# EAGLE board badge_spacehuhn (EAGLE 7.6.0)
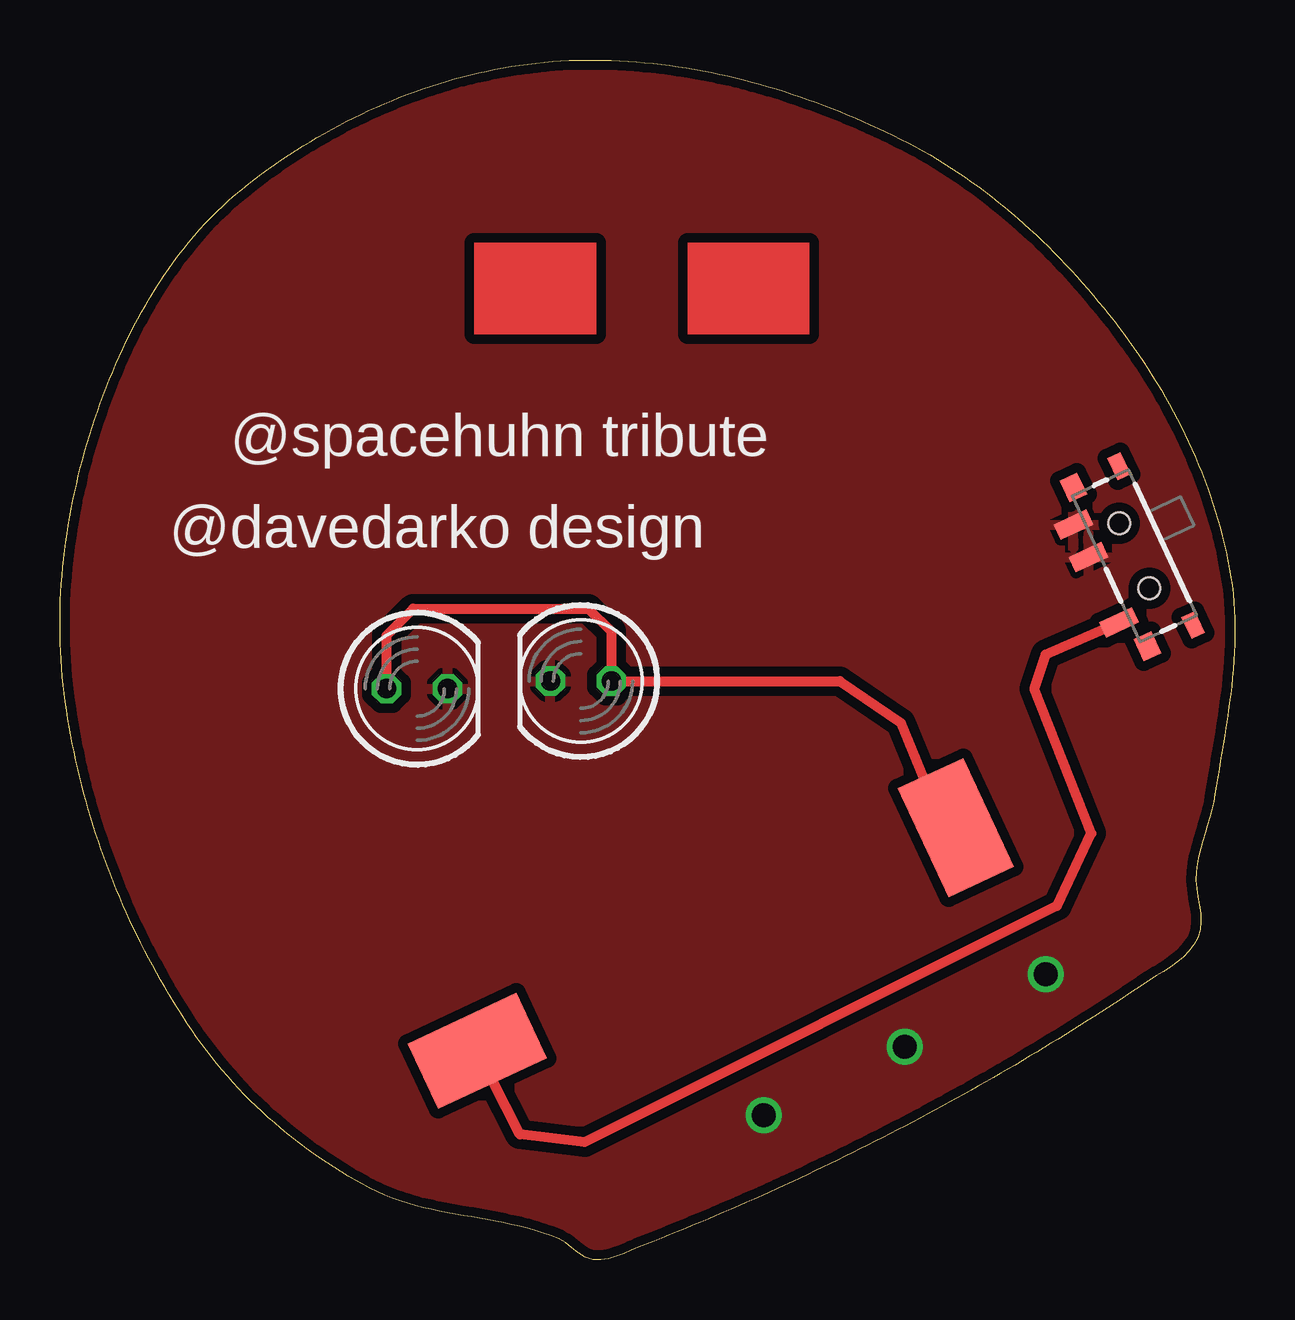
[diagram p0: board, top side]
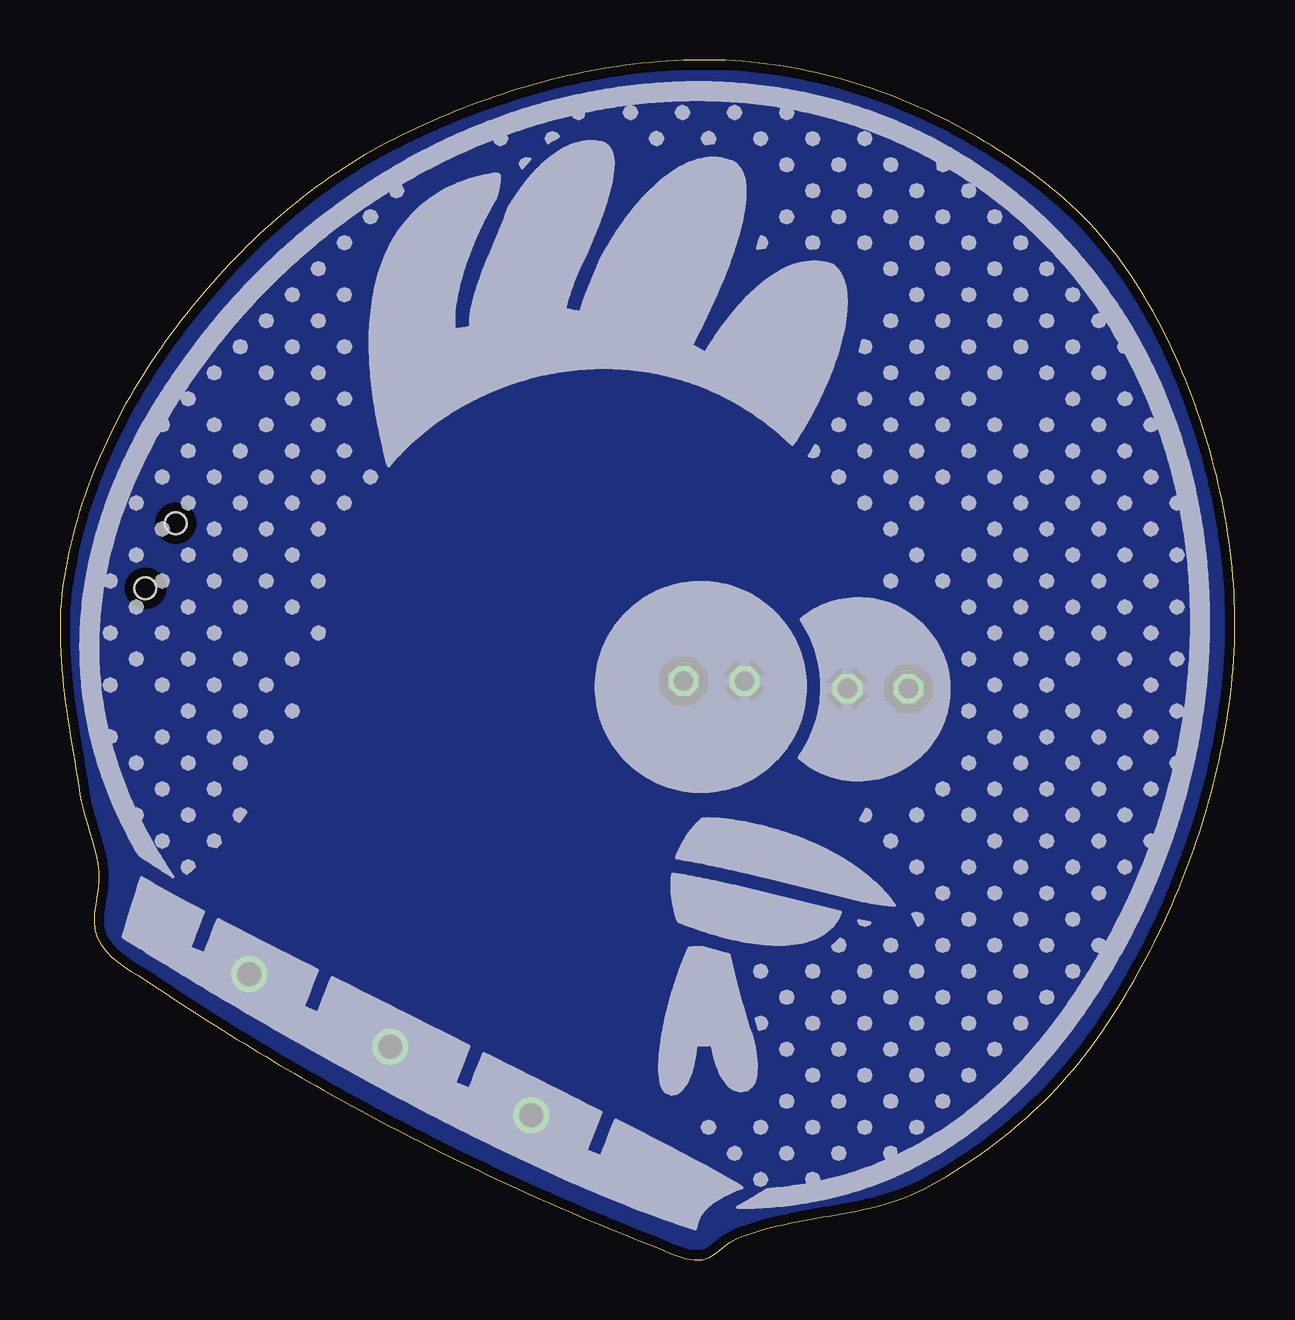
[diagram p1: board, bottom side, seen from below]

Size 48.96 x 50 mm. Coordinates in mm from the lower left corner, seen from the top.
Outline: 20.17,49.9 20.52,49.93 20.87,49.96 21.22,49.98 21.57,49.99 21.92,49.99 22.27,50 22.62,49.99 22.97,49.98 23.32,49.97 23.67,49.95 24.02,49.92 24.37,49.89 24.71,49.86 25.06,49.82 25.41,49.77 25.76,49.72 26.1,49.67 26.45,49.61 26.79,49.54 27.13,49.48 27.48,49.41 27.82,49.33 28.16,49.25 28.5,49.16 28.84,49.08 29.17,48.98 29.51,48.89 29.85,48.79 30.18,48.68 30.51,48.58 30.84,48.46 31.17,48.35 31.5,48.23 31.83,48.11 32.16,47.98 32.48,47.85 32.81,47.72 33.13,47.58 33.45,47.44 33.77,47.3 34.09,47.15 34.4,47.01 34.72,46.85 35.03,46.7 35.34,46.54 35.65,46.38 35.95,46.21 36.25,46.04 36.55,45.86 36.85,45.68 37.14,45.49 37.43,45.3 37.71,45.11 38,44.91 38.28,44.71 38.55,44.5 38.83,44.29 39.1,44.07 39.37,43.86 39.63,43.63 39.9,43.41 40.16,43.18 40.41,42.95 40.67,42.71 40.92,42.47 41.17,42.23 41.41,41.99 41.66,41.74 41.9,41.49 42.13,41.24 42.37,40.98 42.59,40.72 42.82,40.46 43.05,40.2 43.27,39.93 43.49,39.66 43.7,39.39 43.92,39.12 44.13,38.85 44.34,38.57 44.54,38.29 44.74,38.01 44.94,37.72 45.14,37.43 45.33,37.14 45.52,36.85 45.7,36.55 45.88,36.25 46.06,35.95 46.23,35.65 46.39,35.34 46.56,35.03 46.72,34.72 46.87,34.41 47.02,34.09 47.16,33.78 47.3,33.46 47.44,33.13 47.57,32.81 47.69,32.49 47.81,32.16 47.93,31.83 48.04,31.5 48.15,31.17 48.25,30.83 48.34,30.5 48.43,30.16 48.51,29.82 48.59,29.48 48.66,29.14 48.73,28.8 48.79,28.45 48.84,28.11 48.88,27.76 48.91,27.41 48.94,27.06 48.95,26.71 48.96,26.36 48.95,26.01 48.95,25.66 48.93,25.31 48.91,24.96 48.88,24.61 48.85,24.26 48.81,23.91 48.77,23.56 48.73,23.22 48.68,22.87 48.63,22.52 48.58,22.18 48.52,21.83 48.47,21.48 48.41,21.14 48.35,20.79 48.29,20.45 48.24,20.1 48.18,19.75 48.12,19.41 48.06,19.08 47.99,18.76 47.9,18.43 47.81,18.11 47.71,17.79 47.62,17.47 47.53,17.15 47.45,16.83 47.39,16.5 47.34,16.17 47.33,15.82 47.36,15.48 47.42,15.14 47.47,14.79 47.52,14.45 47.54,14.1 47.51,13.76 47.41,13.43 47.24,13.13 47.03,12.86 46.79,12.62 46.53,12.4 46.25,12.2 45.97,12.01 45.68,11.83 45.39,11.65 45.11,11.47 44.82,11.27 44.52,11.08 44.23,10.89 43.94,10.7 43.65,10.5 43.36,10.32 43.06,10.13 42.77,9.94 42.47,9.75 42.18,9.57 41.88,9.38 41.59,9.2 41.29,9.02 40.99,8.83 40.69,8.65 40.39,8.47 40.09,8.3 39.79,8.12 39.49,7.94 39.19,7.77 38.89,7.59 38.58,7.42 38.28,7.25 37.98,7.07 37.67,6.9 37.37,6.73 37.06,6.57 36.76,6.4 36.45,6.23 36.14,6.07 35.83,5.9 35.52,5.74 35.22,5.58 34.91,5.41 34.6,5.25 34.29,5.09 33.98,4.94 33.66,4.78 33.35,4.62 33.04,4.47 32.73,4.31 32.41,4.16 32.1,4.01 31.79,3.85 31.47,3.7 31.16,3.55 30.84,3.41 30.52,3.26 30.21,3.11 29.89,2.97 29.57,2.82 29.25,2.68 28.93,2.54 28.61,2.4 28.29,2.25 27.97,2.12 27.65,1.98 27.33,1.84 27.01,1.7 26.69,1.57 26.37,1.43 26.05,1.3 25.72,1.17 25.4,1.04 25.08,0.91 24.75,0.78 24.43,0.65 24.1,0.52 23.79,0.4 23.49,0.27 23.18,0.15 22.86,0.05 22.53,0 22.2,0.01 21.88,0.11 21.59,0.29 21.33,0.5 21.07,0.71 20.78,0.87 20.46,1 20.14,1.11 19.81,1.22 19.49,1.31 19.16,1.4 18.82,1.47 18.49,1.54 18.16,1.61 17.82,1.67 17.49,1.73 17.15,1.79 16.82,1.85 16.48,1.91 16.14,1.97 15.81,2.03 15.48,2.1 15.14,2.18 14.81,2.26 14.49,2.35 14.16,2.45 13.84,2.57 13.52,2.69 13.21,2.83 12.91,2.99 12.6,3.15 12.3,3.32 12.01,3.49 11.71,3.67 11.42,3.85 11.13,4.04 10.85,4.23 10.56,4.43 10.29,4.63 10.01,4.84 9.74,5.05 9.47,5.26 9.2,5.48 8.94,5.7 8.68,5.93 8.42,6.16 8.17,6.4 7.93,6.64 7.68,6.88 7.44,7.13 7.21,7.38 6.98,7.64 6.76,7.9 6.54,8.17 6.32,8.44 6.11,8.71 5.91,8.99 5.71,9.27 5.51,9.56 5.31,9.85 5.12,10.14 4.93,10.44 4.74,10.74 4.56,11.04 4.38,11.34 4.2,11.65 4.03,11.96 3.86,12.27 3.69,12.58 3.53,12.89 3.37,13.2 3.21,13.52 3.06,13.84 2.91,14.16 2.76,14.48 2.62,14.8 2.48,15.12 2.35,15.45 2.21,15.78 2.09,16.1 1.96,16.43 1.84,16.76 1.72,17.1 1.61,17.43 1.49,17.76 1.39,18.1 1.28,18.44 1.18,18.77 1.09,19.11 0.99,19.45 0.91,19.79 0.82,20.14 0.74,20.48 0.66,20.82 0.59,21.17 0.52,21.51 0.45,21.86 0.39,22.21 0.33,22.55 0.28,22.9 0.23,23.25 0.18,23.6 0.14,23.95 0.1,24.3 0.07,24.65 0.05,25 0.03,25.35 0.01,25.7 0,26.05 0,26.41 0,26.76 0.01,27.11 0.02,27.46 0.04,27.81 0.06,28.16 0.09,28.51 0.12,28.86 0.15,29.21 0.2,29.56 0.24,29.91 0.29,30.25 0.35,30.6 0.41,30.95 0.47,31.29 0.54,31.64 0.61,31.98 0.69,32.32 0.77,32.67 0.85,33.01 0.94,33.35 1.04,33.68 1.14,34.02 1.24,34.36 1.34,34.69 1.45,35.03 1.57,35.36 1.68,35.69 1.81,36.02 1.93,36.35 2.06,36.67 2.19,36.99 2.33,37.32 2.47,37.64 2.62,37.95 2.77,38.27 2.92,38.58 3.08,38.89 3.24,39.2 3.41,39.51 3.58,39.81 3.76,40.12 3.94,40.41 4.13,40.71 4.32,41 4.52,41.29 4.72,41.57 4.93,41.85 5.15,42.13 5.37,42.4 5.59,42.67 5.82,42.93 6.06,43.19 6.3,43.44 6.55,43.69 6.8,43.93 7.06,44.17 7.33,44.39 7.59,44.61 7.86,44.83 8.14,45.04 8.41,45.25 8.69,45.46 8.97,45.66 9.26,45.85 9.55,46.04 9.84,46.23 10.13,46.42 10.42,46.6 10.72,46.77 11.02,46.95 11.32,47.11 11.63,47.28 11.94,47.44 12.24,47.59 12.56,47.75 12.87,47.89 13.18,48.03 13.5,48.17 13.82,48.31 14.14,48.43 14.46,48.56 14.79,48.68 15.12,48.79 15.44,48.9 15.77,49.01 16.1,49.11 16.44,49.21 16.77,49.3 17.11,49.38 17.44,49.46 17.78,49.54 18.12,49.61 18.46,49.67 18.8,49.73 19.14,49.78 19.49,49.83 19.83,49.87 20.17,49.9
Copper layers (1*16): Top 0.0356mm / dielectric 1.5011mm / Bottom 0.0356mm
Design rules "LaenPCBOrder": minimum track width 6mil, minimum drill 13mil, track to track 6mil, track to pad 6mil, pad to pad 6mil, via to via 6mil, smd to smd 6mil, copper to edge 15mil, drill to drill 6mil, minimum pad ring 7mil, minimum via ring 7mil, stop-mask expansion 3mil, vias tented up to drill 0mil, thermal gap 10mil

## Footprints (pad centres in the part's own frame; a part is rotated, then mirrored left to right if it is on the bottom)
LED5MM = drill 0.813 octagon: A -1.27,0; K 1.27,0
SWITCH-SPST-SMD-A = smd 0.7 x 1.5: 1 -2.25,-1.75; 2 -0.75,-1.75; 3 2.25,-1.75 | smd 1 x 0.6: GND1 -3.65,1; GND3 3.65,1 | smd 1 x 0.8: GND2 -3.65,-1.1; GND4 3.65,-1.1 | hole 0.9: -1.5,0; 1.5,0
CR2032SMD = smd 5 x 3: + 0,-11 | smd 3 x 5: - 0,11

## Placement (x,y rotation side)
LED1  [LED5MM]  21.7,24.12 180 top
LED2  [LED5MM]  14.88,23.8 0 top
S1  [SWITCH-SPST-SMD-A]  44.76,29.34 295 top
U$1  CR2032SMD  [CR2032SMD]  27.36,13.36 115 top
U$2  [DAVEDARKO_GOLD]  7.1,18.25 0 top

## Library data of the parts
LED1 LED2 = led
S1 = SparkFun-Electromechanical
U$1 = battery
U$2 = LOGOS

## Nets
GND: LED1.K LED2.K S1.1 S1.2
N$3: S1.3 U$1.-
VCC: LED1.A LED2.A U$1.+

## Tracks (layer width: path | path; a pad name or v marks a point on that pad's centre or on a via)
GND  (via drill 1)
  other vias: 29.32,6.02 41.07,11.9 35.2,8.88
  pour Top (isolate 0.406): -1.79,50 49.01,50 49.01,-0.8 -1.79,-0.8
  pour Bottom (isolate 0.406): -4.33,51.27 51.55,51.27 51.55,-2.07 -4.33,-2.07
N$3
  Top 0.406: U$1.- 19.16,5.23 21.86,4.91 41.55,14.75 42.98,17.77 40.59,23.8 41.07,25.23 S1.3
VCC
  Top 0.406: LED2.A 13.61,26.02 14.72,27.14 22.02,27.14 22.97,26.18 LED1.A 32.5,24.12 35.04,22.37 36.47,18.87 U$1.+
(copper drawn outside any net)
  shapes: Top area x2

## Text on the board
tNames: @spacehuhn tribute | @davedarko design